# Altium PCB PCB1.PcbDoc (part 1 of 2)
Units mm, origin at the board's own origin, x right, y up, seen from the top; angles counter-clockwise.
Board outline 138.94 x 170 mm, 2 copper layers (Top Layer, Bottom Layer); 258 components, 165 nets, 778 pads, 42 vias.
Unrouted connection lines stored in the file: 312.
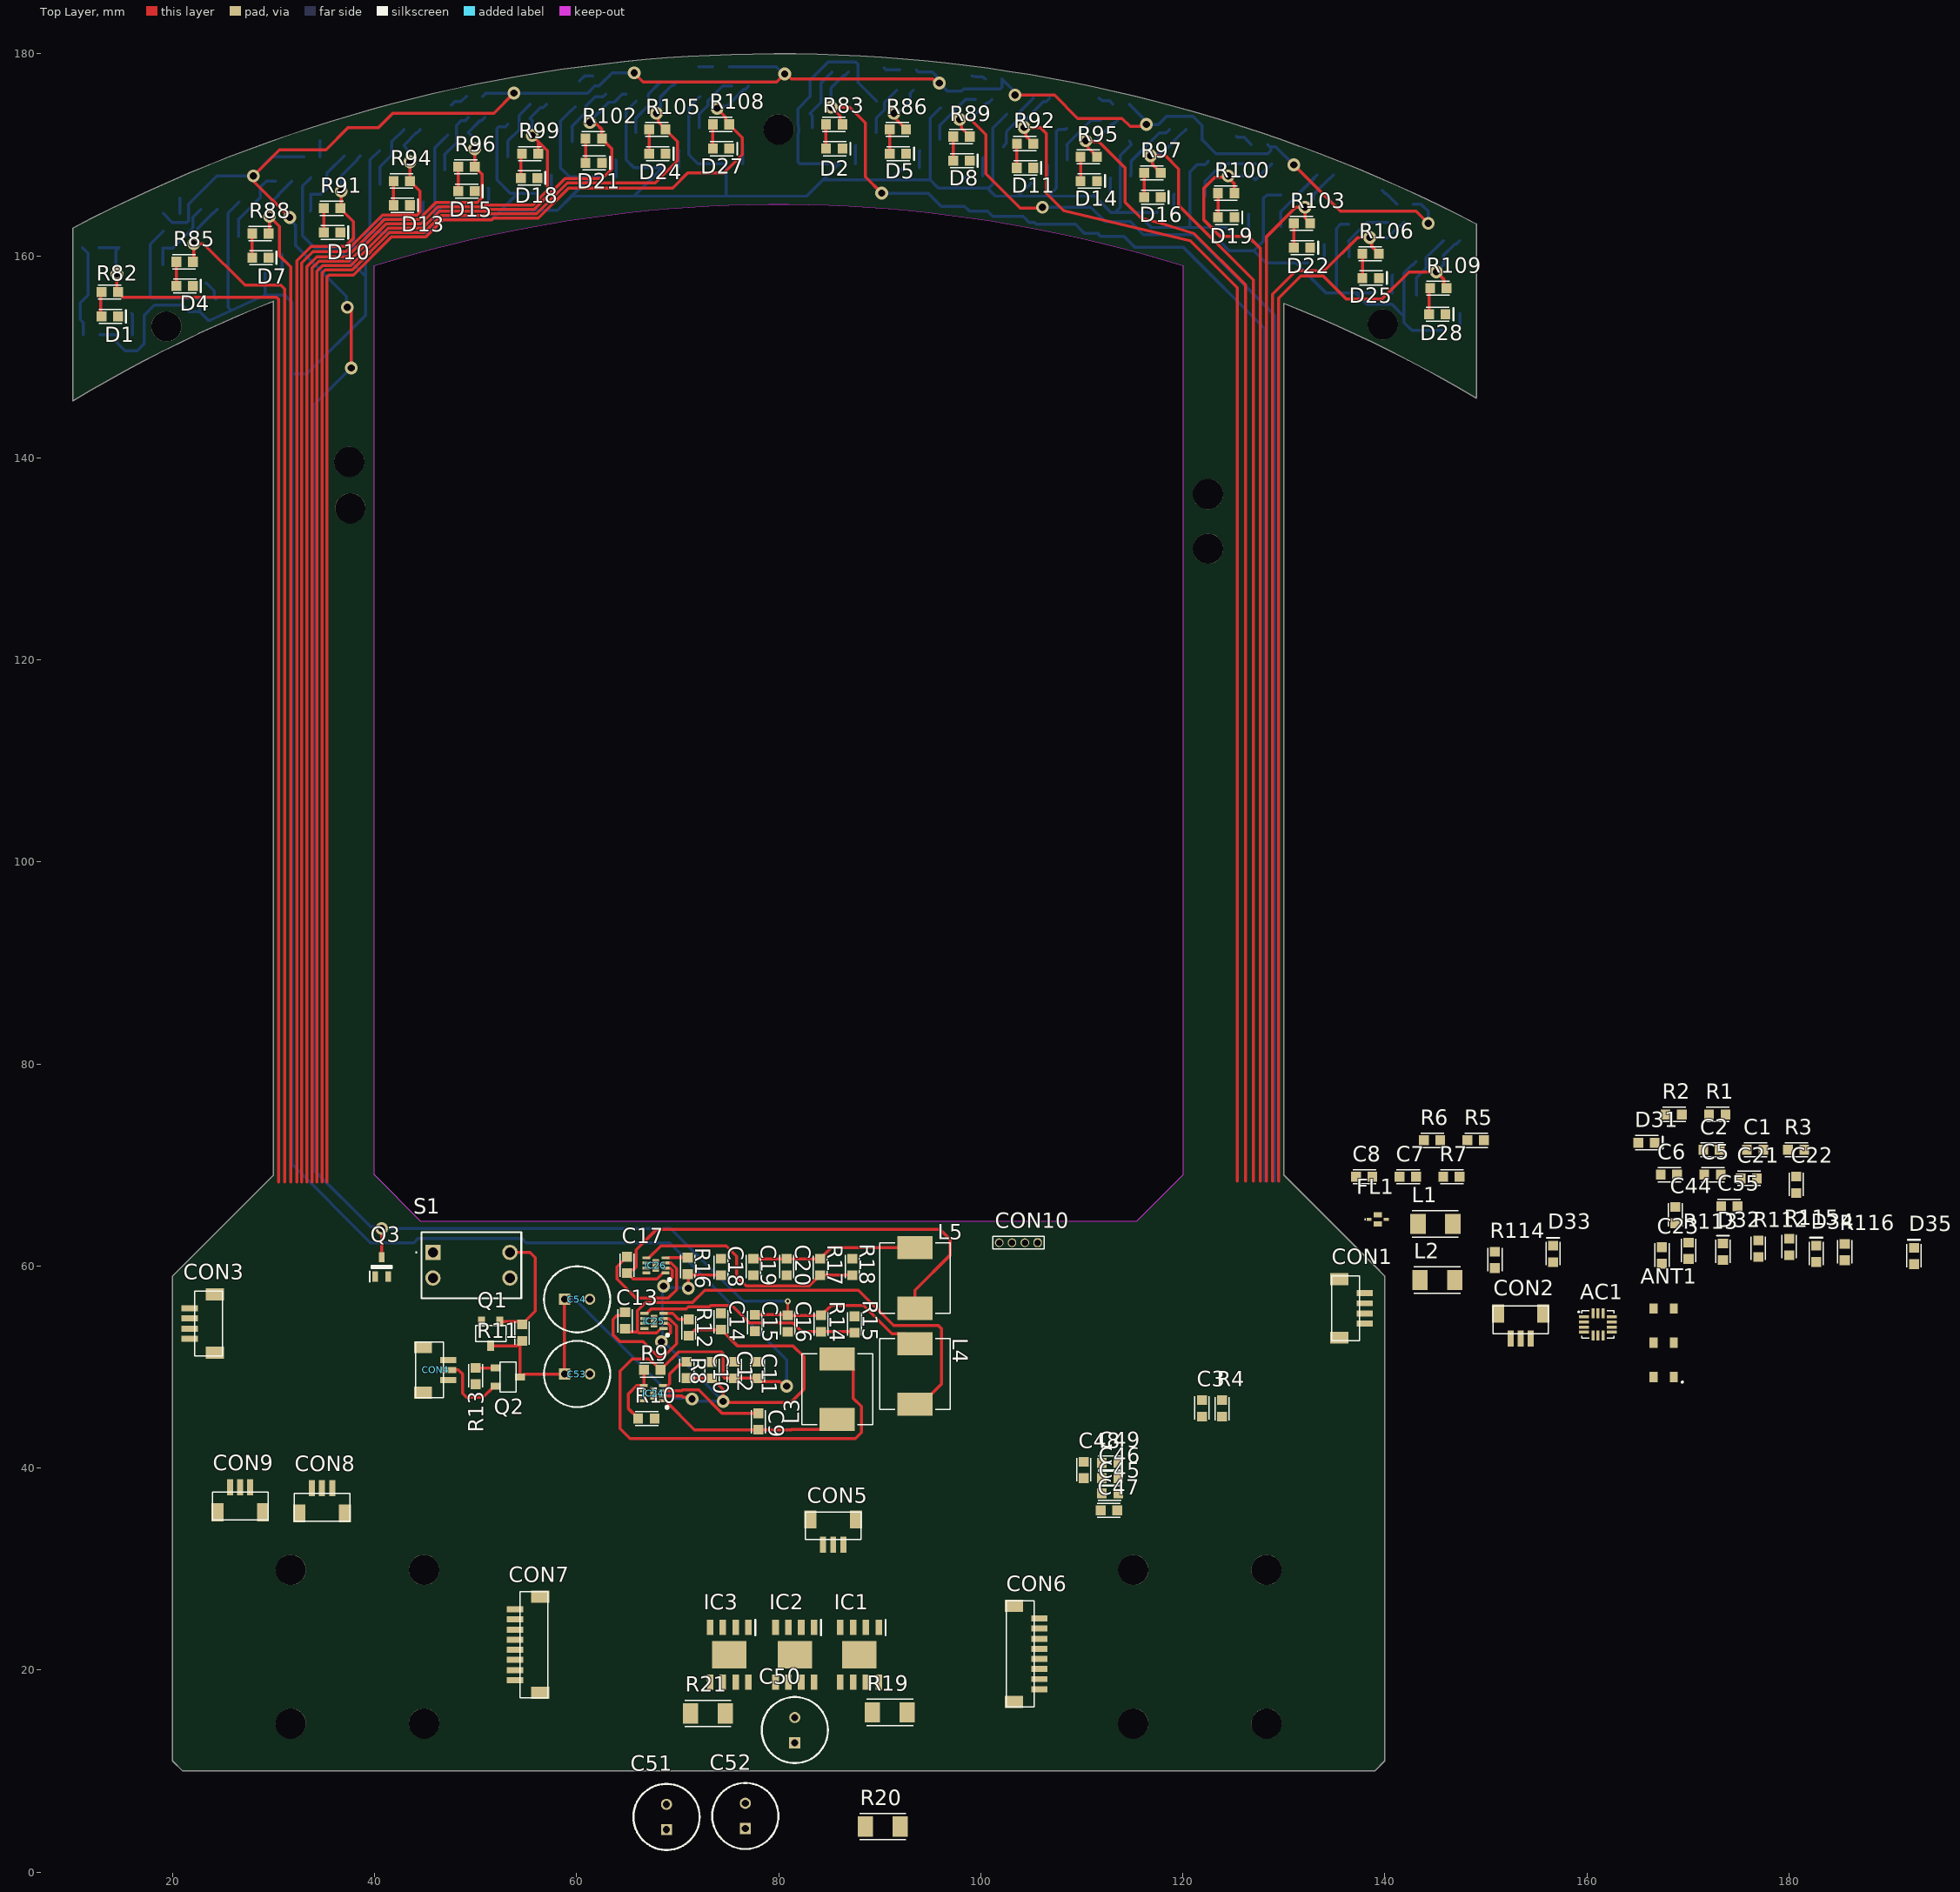
[diagram p0: Top Layer view]
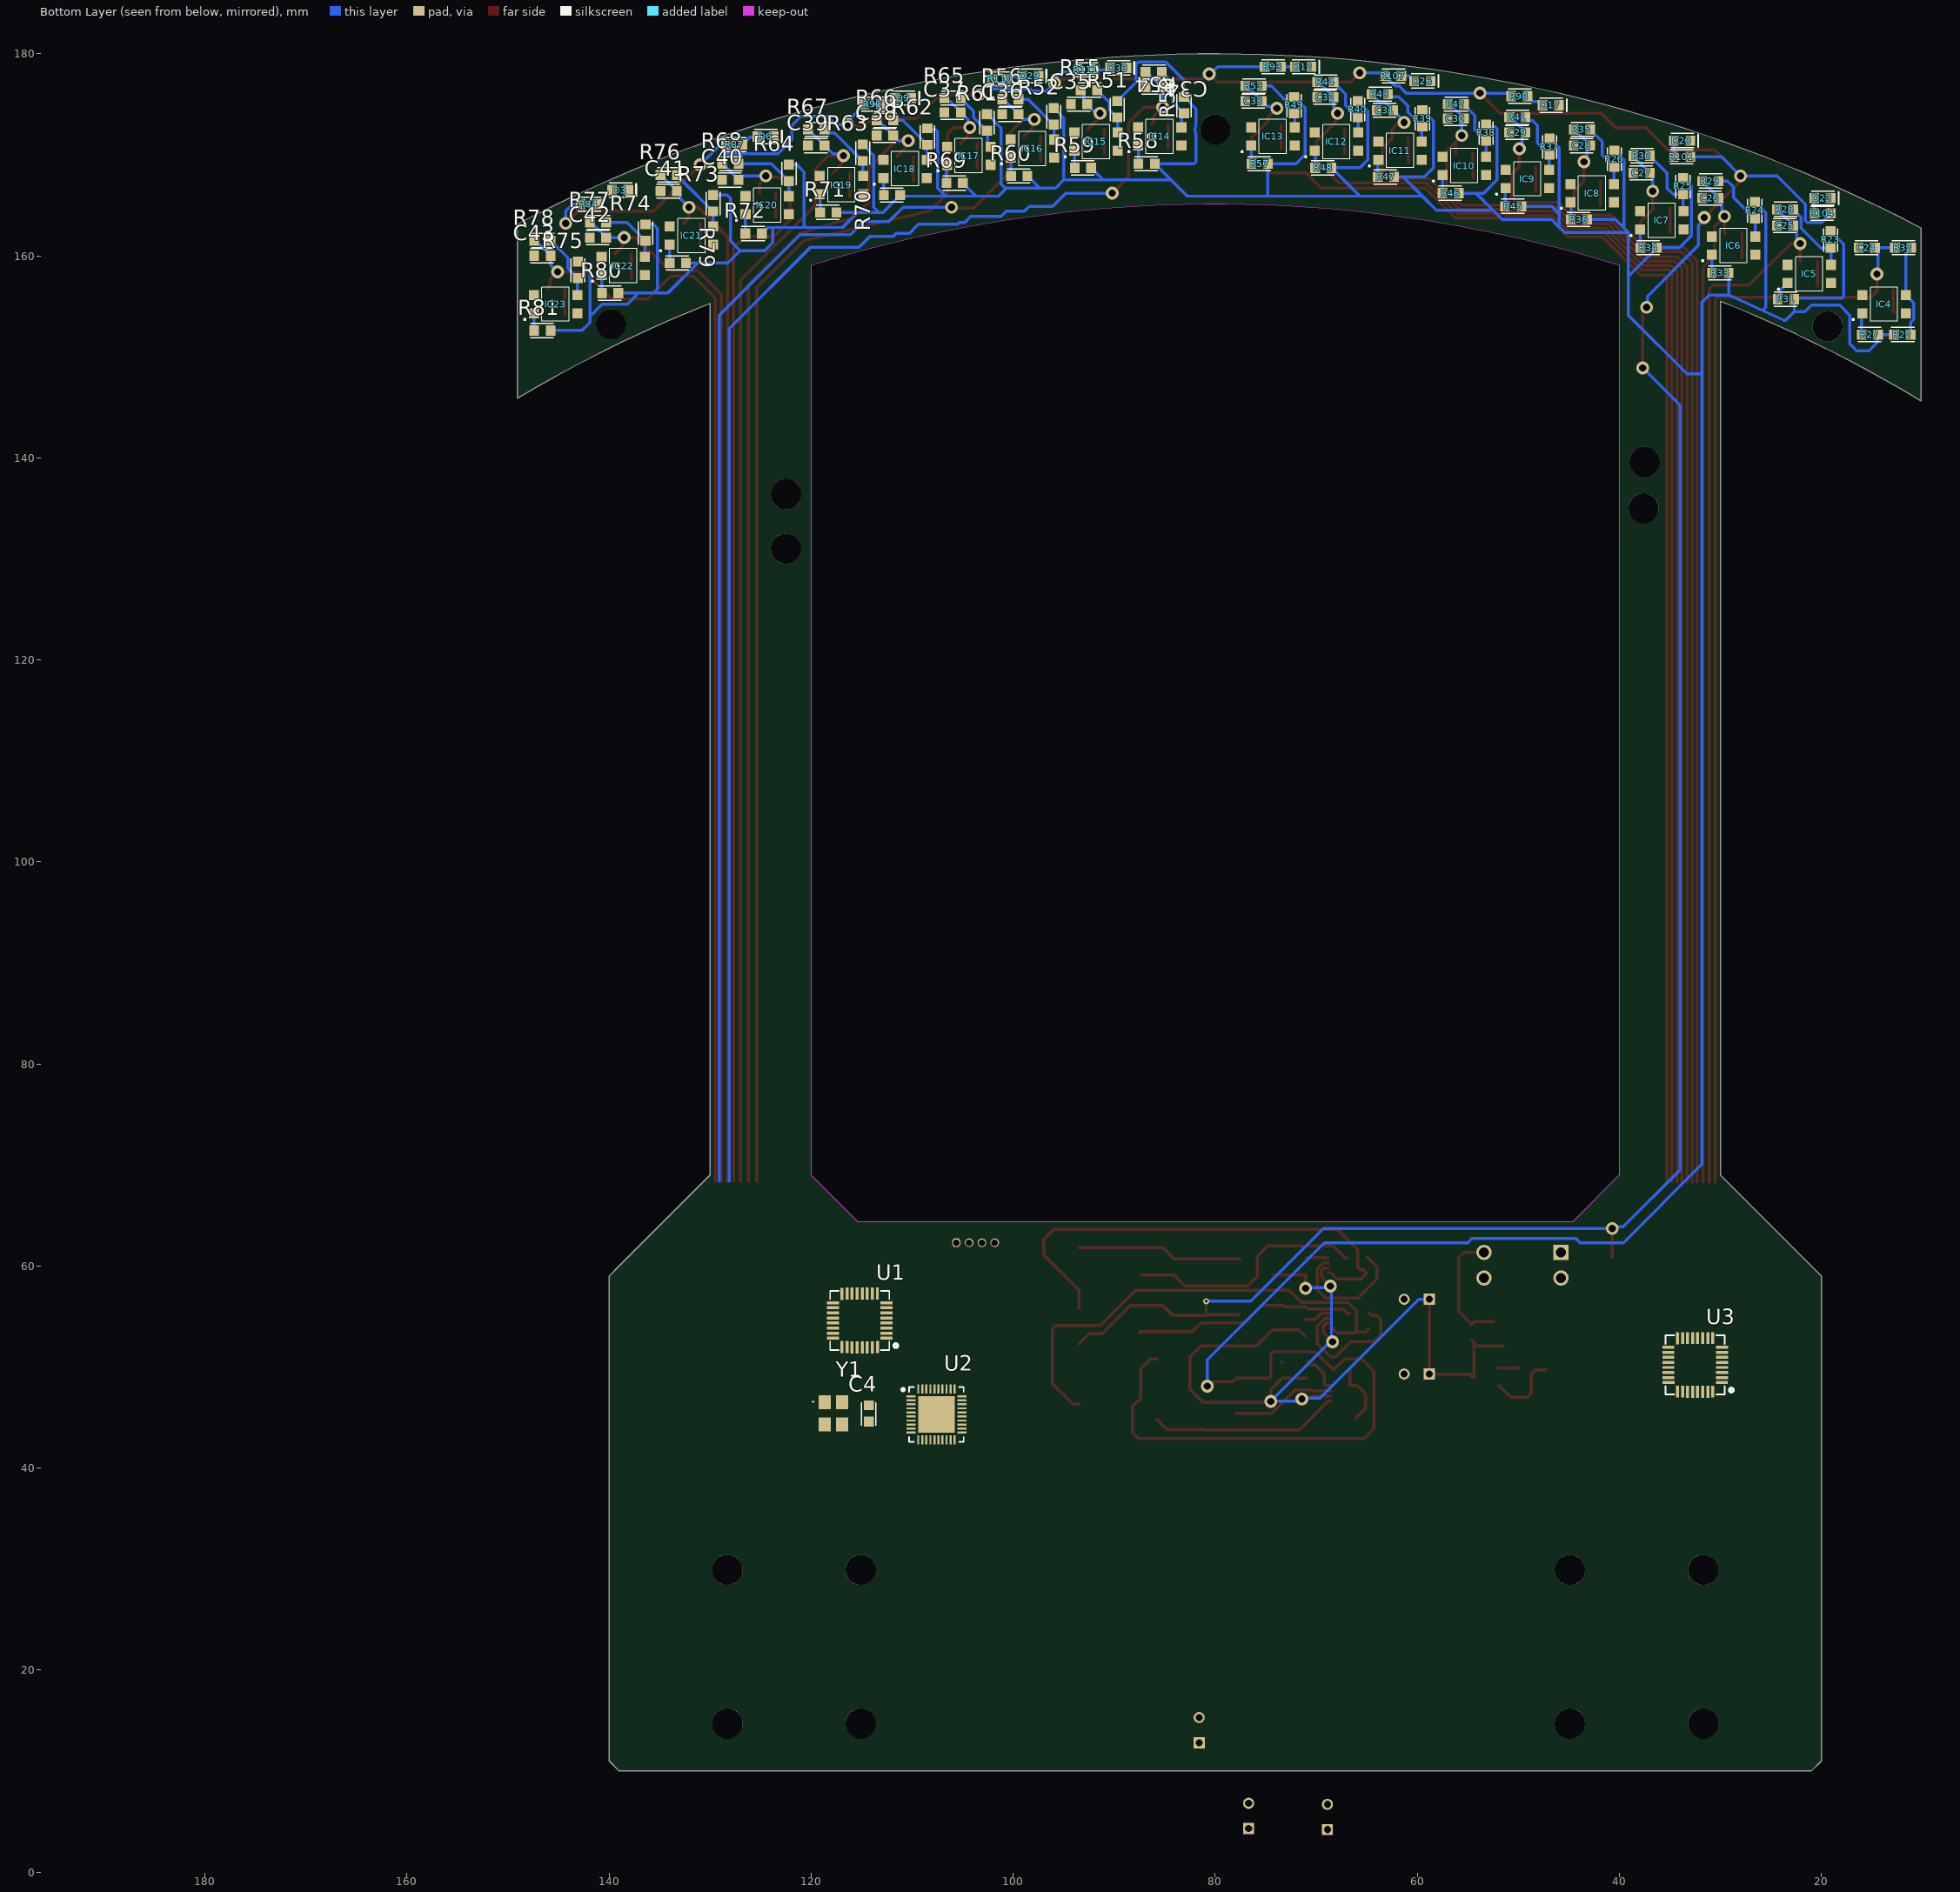
[diagram p1: Bottom Layer view, seen from below]

## Layer stack, top to bottom
Top Solder: solder mask 0.0102, Solder Resist, Dk 3.5
Top Layer: signal copper 0.0356
Dielectric 1: dielectric 0.32, FR-4, Dk 4.8
Bottom Layer: signal copper 0.0356
Bottom Solder: solder mask 0.0102, Solder Resist, Dk 3.5

## Board outline
20,11 21,10 139,10 140,11 140,59 139,60 130,69 130,155.301 cw(c80,30) 149.05,145.899 149.077,145.945 149.077,163.148 ccw(c80,30) 10.138,162.738 10.138,145.665 10.151,145.643 cw(c80,30) 29.998,155.506 29.998,69.002 30,69 21,60 20,59
cut-out: 44.6,64.4 40,69 39.99,69.01 39.99,159.032 cw(c80,30) 120.01,159.032 120.01,69 120,69 115.4,64.4

## Design rules (kind name [scope] priority, off if disabled: settings)
Clearance [All] p1: gap=0.254 ignorepadtopadclearanceinfootprint=TRUE except(0.127: Arc-Arc Arc-Track Arc-SMDPad Arc-Via Arc-Text Track-Track Track-SMDPad Track-Via Track-Text SMDPad-SMDPad SMDPad-Via SMDPad-Text THPad-Via THPad-Text Via-Via Via-Text Fill-Text Poly-Text Region-Text Text-Text Text-Hole; 0.2: Arc-THPad Track-THPad SMDPad-THPad; 0.33: Arc-Hole Track-Hole SMDPad-Hole THPad-Hole Via-Hole Fill-Hole Poly-Hole Region-Hole; 0.5: THPad-THPad)
HoleSize [All] p1: absolutevalues=TRUE maxlimit=2.54 minlimit=0.02 maxpercent=80.000 minpercent=20.000
HoleToHoleClearance [All] p1: gap=0.127 allowstackedmicrovias=TRUE
PlaneClearance [All] p1: clearance=0.3
PlaneConnect PlaneConnect_1 [(HasFootprint('R 2512'))] p1: planeconnectstyle=Relief reliefexpansion=0.508 reliefentries=4 reliefconductorwidth=0.254 reliefairgap=0.254
PlaneConnect [All] p2: planeconnectstyle=Relief reliefexpansion=0.508 reliefentries=4 reliefconductorwidth=0.254 reliefairgap=0.254
PolygonConnect "Polygon Power Connection" [(HasFootprint('DFN 5x6')) OR (HasFootprint('R 2512')) OR IsVia OR HasFootprint('SMD PAD')] p1: connectstyle=Direct reliefconductorwidth=0.254 reliefentries=4 polygonreliefangle="90 Angle" airgapwidth=0.254 // Conection to high power components
PolygonConnect [All] p2: connectstyle=Relief reliefconductorwidth=0.254 reliefentries=4 polygonreliefangle="90 Angle" airgapwidth=0.254
RoutingVias [All] p1: holewidth=0.3 width=0.5 viastyle="Through Hole" minholewidth=0.2 minwidth=0.3 maxholewidth=1 maxwidth=1.27
SilkToSilkClearance [All] p1: silktosilkclearance=0.127
SolderMaskExpansion [All] p1: expansion=0.102 istentingtop=TRUE
Width [All] p1: maxlimit=0.508 minlimit=0.127 preferedwidth=0.3
25 further rules are at their usual default settings.

## Classes and differential pairs
component class zasilanie: 150uF *1 *2 *3 C9 C10 C11 C12 C13 C14 C15 C16 C17 C18 C19 C20 C53 C54 CON4 IC24 IC25 IC26 L3 L4 L5 Q1 Q2 R8 R9 R10 R11 R12 R13 R14 R15 R16 R17 R18 S1
component class STM-LF: AC1 C5 C6 C7 C8 CON2 CON3 D31 D32 D33 R5 R6 R7 R112 R113 R114 U3
component class STM+WirelessModule: ANT1 C1 C2 C3 C4 C44 C45 C46 C47 C48 C49 C55 CON1 CON10 D34 D35 FL1 L1 L2 R1 R2 R3 R4 R115 R116 U1 U2 Y1
component class silniki: 0,1µF * C21 C22 C23 C50 C51 C52 CON5 CON6 CON7 CON8 CON9 IC1 IC2 IC3 R19 R20 R21
component class Ledy: D1 D2 D3 D4 D5 D6 D7 D8 D9 D10 D11 D12 D13 D14 D15 D16 D17 D18 D19 D20 D21 D22 D23 D24 D25 D26 D27 D28 D29 D30 Q3 R82 R83 R84 R85 R86 R87 R88 R89 R90 R91 R92 R93 R94 R95 R96 R97 R98 R99 R100 R101 R102 R103 R104 R105 R106 R107 R108 R109 R110 R111
component class KTIR-FRONT: C24 C25 C26 C27 C28 C29 C30 C31 C32 C33 C34 C35 C36 C37 C38 C39 C40 C41 C42 C43 IC4 IC5 IC6 IC7 IC8 IC9 IC10 IC11 IC12 IC13 IC14 IC15 IC16 IC17 IC18 IC19 IC20 IC21 IC22 IC23 R22 R23 R24 R25 R26 R27 R28 R29 R30 R31 R32 R33 R34 R35 R36 R37 R38 R39 R40 R41 R42 R43 R44 R45 R46 R47 R48 R49 R50 R51 R52 R53 R54 R55 R56 R57 R58 R59 R60 R61 R62 R63 R64 R65 R66 R67 R68 R69 R70 R71 R72 R73 R74 R75 R76 R77 R78 R79 R80 R81

## Components (designator, comment, footprint, x,y, rotation, side; value= is the part's Value field where it differs from the comment)
AC1 "LSM6DSOXTR" LGA-14_1 161.1,54.2 r0 top
ANT1 "M830520" M830520 167.6,52.4 r90 top
C1 "10uF" "C 0603" 176.657,71.501 r0 top
C2 "100nF" "C 0603" 172.339,71.501 r0 top
C3 "6.8pF" "C 0603" 121.9,45.9 r90 top
C4 "6.8pF" "C 0603" 114.3,45.4 r270 bottom
C5 "100nF" "C 0603" 172.433,69.031 r0 top
C6 "100nF" "C 0603" 168.115,69.031 r0 top
C7 "10uF" "C 0603" 142.276,68.831 r0 top
C8 "100nF" "C 0603" 137.958,68.831 r0 top
C9 "100nF" "C 0603" 78,44.6 r270 top
C10 "10uF" "C 0603" 73.4,49.674 r270 top
C11 "22uF" "C 0603" 77.9,49.687 r270 top
C12 "22uF" "C 0603" 75.6,49.687 r270 top
C13 "100nF" "C 0603" 64.8,54.6 r270 top
C14 "10uF" "C 0603" 74.3,54.5 r270 top
C15 "22uF" "C 0603" 77.637,54.352 r90 top
C16 "22uF" "C 0603" 80.9,54.3 r90 top
C17 "100nF" "C 0603" 65,60.1 r270 top
C18 "10uF" "C 0603" 74.3,59.9 r270 top
C19 "22uF" "C 0603" 77.5,59.9 r90 top
C20 "22uF" "C 0603" 80.8,59.9 r90 top
C21 "47µF" "C 0603" 176.023,68.671 r0 top
C22 "47µF" "C 0603" 180.722,68.036 r90 top
C23 "47µF" "C 0603" 167.434,61.036 r90 top
C24 "22nF" "C 0603" 15.513,160.8 r0 bottom
C25 "22nF" "C 0603" 23.6,163 r0 bottom
C26 "22nF" "C 0603" 31,165.7 r0 bottom
C27 "22nF" "C 0603" 37.8,168.2 r0 bottom
C28 "22nF" "C 0603" 43.7,170.9 r0 bottom
C29 "22nF" "C 0603" 50.1,172.2 r0 bottom
C30 "22nF" "C 0603" 56.2,173.6 r0 bottom
C31 "22nF" "C 0603" 63.2,174.4 r0 bottom
C32 "22nF" "C 0603" 69.1,175.7 r0 bottom
C33 "22nF" "C 0603" 76.2,175.3 r0 bottom
C34 "22nF" "C 0603" 86.1,176.7 r0 bottom
C35 "22nF" "C 0603" 93.487,175 r0 bottom
C36 "22nF" "C 0603" 100.287,174 r0 bottom
C37 "22nF" "C 0603" 106,174.2 r0 bottom
C38 "22nF" "C 0603" 112.7,171.9 r0 bottom
C39 "22nF" "C 0603" 119.5,170.9 r0 bottom
C40 "22nF" "C 0603" 128,167.5 r0 bottom
C41 "22nF" "C 0603" 134.1,166.4 r0 bottom
C42 "22nF" "C 0603" 141.1,161.8 r0 bottom
C43 "22nF" "C 0603" 146.6,160 r0 bottom
C44 "1uF" "C 0603" 168.757,65.037 r90 top
C45 "0.1uF" "C 0603" 112.8,37.5 r180 top
C46 "0.1uF" "C 0603" 112.8,39 r180 top
C47 "0.1uF" "C 0603" 112.7,35.8 r180 top
C48 "0.1uF" "C 0603" 110.2,39.8 r90 top
C49 "0.1uF" "C 0603" 112.8,40.5 r180 top
C50 "0.1uF" CAPPRD250W50D655H1250 81.6,12.8 r90 top
C51 "0.1uF" CAPPRD250W50D655H1250 68.9,4.202 r90 top
C52 "0.1uF" CAPPRD250W50D655H1250 76.7,4.302 r90 top
C53 "150uF" CAPPRD250W50D655H1250 58.8,49.3 r0 top
C54 "150uF" CAPPRD250W50D655H1250 58.8,56.7 r0 top
C55 "10pF" "C 0603" 174.1,65.9 r180 top
CON1 "4 PIN" BM04B-SRSS-TB 136.5,55.8 r90 top
CON2 "3 Pin" BM03B-SRSS-TB 153.45,54.3 r0 top
CON3 "4 PIN" BM04B-SRSS-TB 23.2,54.3 r270 top
CON4 "3 Pin" BM03B-SRSS-TB 45.8,49.7 r90 top
CON5 "3 Pin" BM03B-SRSS-TB 85.4,33.9 r0 top
CON6 "JST" BM08B-SRSS-TB 104.3,21.6 r90 top
CON7 "JST" BM08B-SRSS-TB 55.4,22.5 r270 top
CON8 "3 Pin" BM03B-SRSS-TB 34.8,36.5 r180 top
CON9 "3 Pin" BM03B-SRSS-TB 26.7,36.6 r180 top
CON10 "CON?" "Goldpin 1.27mm 4PIN" 103.735,62.3 r180 top
D1 "LED WHITE" "LED 0603 White" 13.8,154 r0 top
D2 "LED WHITE" "LED 0603 White" 85.5,170.6 r0 top
D3 "LED WHITE" "LED 0603 White" 138.913,166.5 r180 bottom
D4 "LED WHITE" "LED 0603 White" 21.2,157 r0 top
D5 "LED WHITE" "LED 0603 White" 91.8,170.1 r0 top
D6 "LED WHITE" "LED 0603 White" 124.513,171.8 r180 bottom
D7 "LED WHITE" "LED 0603 White" 28.7,159.8 r0 top
D8 "LED WHITE" "LED 0603 White" 98.1,169.4 r0 top
D9 "LED WHITE" "LED 0603 White" 110.9,175.6 r180 bottom
D10 "LED WHITE" "LED 0603 White" 35.8,162.3 r0 top
D11 "LED WHITE" "LED 0603 White" 104.387,168.7 r0 top
D12 "LED WHITE" "LED 0603 White" 71.3,178.7 r180 bottom
D13 "LED WHITE" "LED 0603 White" 42.7,165 r0 top
D14 "LED WHITE" "LED 0603 White" 110.7,167.4 r0 top
D15 "LED WHITE" "LED 0603 White" 49.1,166.4 r0 top
D16 "LED WHITE" "LED 0603 White" 117,165.8 r0 top
D17 "LED WHITE" "LED 0603 White" 46.8,174.9 r180 bottom
D18 "LED WHITE" "LED 0603 White" 55.3,167.7 r0 top
D19 "LED WHITE" "LED 0603 White" 124.3,163.8 r0 top
D20 "LED WHITE" "LED 0603 White" 33.8,171.4 r180 bottom
D21 "LED WHITE" "LED 0603 White" 61.7,169.2 r0 top
D22 "LED WHITE" "LED 0603 White" 131.8,160.8 r0 top
D23 "LED WHITE" "LED 0603 White" 19.9,165.7 r180 bottom
D24 "LED WHITE" "LED 0603 White" 68,170.1 r0 top
D25 "LED WHITE" "LED 0603 White" 138.6,157.8 r0 top
D26 "LED WHITE" "LED 0603 White" 59.5,177.3 r180 bottom
D27 "LED WHITE" "LED 0603 White" 74.3,170.6 r0 top
D28 "LED WHITE" "LED 0603 White" 145.2,154.2 r0 top
D29 "LED WHITE" "LED 0603 White" 98.313,177.8 r180 bottom
D30 "LED WHITE" "LED 0603 White" 89.613,178.6 r180 bottom
D31 "LED WHITE" "LED 0603 White" 165.9,72.2 r0 top
D32 "LED WHITE" "LED 0603 White" 173.467,61.4 r90 top
D33 "LED WHITE" "LED 0603 White" 156.667,61.187 r90 top
D34 "LED WHITE" "LED 0603 White" 182.7,61.2 r90 top
D35 "LED WHITE" "LED 0603 White" 192.381,60.989 r90 top
FL1 "DEA162450BT-1295A1" DEA162450BT1295A1 139.3,64.6 r0 top
IC1 "DRV8251DDAR" SOIC127P600X170-9N 88,21.5 r270 top
IC2 "DRV8251DDAR" SOIC127P600X170-9N 81.6,21.5 r270 top
IC3 "DRV8251DDAR" SOIC127P600X170-9N 75.1,21.5 r270 top
IC4 "KTIR0711S" KTIR0711S 13.8,155.2 r180 bottom
IC5 "KTIR0711S" KTIR0711S 21.2,158.2 r180 bottom
IC6 "KTIR0711S" KTIR0711S 28.7,161 r180 bottom
IC7 "KTIR0711S" KTIR0711S 35.8,163.5 r180 bottom
IC8 "KTIR0711S" KTIR0711S 42.7,166.2 r180 bottom
IC9 "KTIR0711S" KTIR0711S 49.1,167.6 r180 bottom
IC10 "KTIR0711S" KTIR0711S 55.35,168.9 r180 bottom
IC11 "KTIR0711S" KTIR0711S 61.7,170.4 r180 bottom
IC12 "KTIR0711S" KTIR0711S 68,171.3 r180 bottom
IC13 "KTIR0711S" KTIR0711S 74.3,171.8 r180 bottom
IC14 "KTIR0711S" KTIR0711S 85.5,171.8 r180 bottom
IC15 "KTIR0711S" KTIR0711S 91.8,171.3 r180 bottom
IC16 "KTIR0711S" KTIR0711S 98.1,170.6 r180 bottom
IC17 "KTIR0711S" KTIR0711S 104.4,169.9 r180 bottom
IC18 "KTIR0711S" KTIR0711S 110.7,168.6 r180 bottom
IC19 "KTIR0711S" KTIR0711S 117,167 r180 bottom
IC20 "KTIR0711S" KTIR0711S 124.35,165 r180 bottom
IC21 "KTIR0711S" KTIR0711S 131.85,162 r180 bottom
IC22 "KTIR0711S" KTIR0711S 138.6,159 r180 bottom
IC23 "KTIR0711S" KTIR0711S 145.3,155.2 r180 bottom
IC24 "RT7251" SON50P200X200X80-9N-D 67.6,47.4 r180 top
IC25 "RT7251" SON50P200X200X80-9N-D 67.65,54.55 r180 top
IC26 "RT7251" SON50P200X200X80-9N-D 67.85,60.05 r180 top
L1 "22uH" "L 1206" 145.013,64.166 r0 top
L2 "22uH" "L 1206" 145.2,58.6 r0 top
L3 "15uH" HPI0630 85.8,47.8 r90 top
L4 "22uH" HPI0630 93.5,49.3 r90 top
L5 "4.7uH" HPI0630 93.5,58.8 r90 top
Q1 "Model" SOT23-3 51.5,53.3 r180 top
Q2 "Model" SOT23-3 53.2,49 r270 top
Q3 "Model" SOT323 40.7,59.9 r90 top
R1 "20k" "R 0603" 172.915,75.001 r0 top
R2 "5.6k" "R 0603" 168.597,75.001 r0 top
R3 "10k" "R 0603" 180.721,71.501 r0 top
R4 "150" "R 0603" 123.9,45.9 r270 top
R5 "1k" "R 0603" 148.996,72.431 r0 top
R6 "1k" "R 0603" 144.678,72.431 r0 top
R7 "10k" "R 0603" 146.594,68.831 r0 top
R8 "100k" "R 0603" 70.9,49.7 r270 top
R9 "110k" "R 0603" 67.487,49.7 r180 top
R10 "36k" "R 0603" 66.9,44.9 r0 top
R11 "10k" "R 0603" 54.6,53.4 r270 top
R12 "100k" "R 0603" 71.1,53.9 r270 top
R13 "100k" "R 0603" 50,49.1 r90 top
R14 "120k" "R 0603" 84.2,54.3 r270 top
R15 "22k" "R 0603" 87.5,54.2 r90 top
R16 "100k" "R 0603" 71,60 r270 top
R17 "110k" "R 0603" 84.1,59.9 r270 top
R18 "91K" "R 0603" 87.3,59.9 r90 top
R19 "0.2R" "R 1206" 91,15.8 r180 top
R20 "0.2R" "R 1206" 90.3,4.5 r180 top
R21 "0.2R" "R 1206" 73,15.7 r0 top
R22 "10k" "R 0603" 11.987,152.2 r180 bottom
R23 "10k" "R 0603" 19.1,161.613 r270 bottom
R24 "10k" "R 0603" 26.6,164.5 r270 bottom
R25 "10k" "R 0603" 33.7,166.9 r270 bottom
R26 "10k" "R 0603" 40.5,169.6 r270 bottom
R27 "120R" "R 0603" 15.213,152.2 r0 bottom
R28 "8k" "R 0603" 23.6,164.6 r180 bottom
R29 "8k" "R 0603" 31,167.4 r180 bottom
R30 "8k" "R 0603" 37.8,169.9 r180 bottom
R31 "120R" "R 0603" 23.5,155.7 r0 bottom
R32 "8k" "R 0603" 11.913,160.8 r180 bottom
R33 "120R" "R 0603" 30,158.3 r0 bottom
R34 "120R" "R 0603" 37.1,160.8 r0 bottom
R35 "8k" "R 0603" 43.7,172.5 r180 bottom
R36 "120R" "R 0603" 44,163.6 r0 bottom
R37 "10k" "R 0603" 46.9,170.8 r270 bottom
R38 "10k" "R 0603" 53.2,172.2 r270 bottom
R39 "10k" "R 0603" 59.5,173.6 r270 bottom
R40 "10k" "R 0603" 65.9,174.5 r270 bottom
R41 "8k" "R 0603" 50.1,173.7 r180 bottom
R42 "8k" "R 0603" 56.2,175 r180 bottom
R43 "8k" "R 0603" 63.713,176 r180 bottom
R44 "8k" "R 0603" 69.1,177.2 r180 bottom
R45 "120R" "R 0603" 50.5,164.9 r0 bottom
R46 "120R" "R 0603" 56.7,166.2 r0 bottom
R47 "120R" "R 0603" 63.1,167.8 r0 bottom
R48 "120R" "R 0603" 69.3,168.7 r0 bottom
R49 "10k" "R 0603" 72.2,174.913 r270 bottom
R50 "10k" "R 0603" 83.1,174.913 r270 bottom
R51 "10k" "R 0603" 89.7,174.5 r270 bottom
R52 "10k" "R 0603" 96,173.8 r270 bottom
R53 "8k" "R 0603" 76.2,176.8 r180 bottom
R54 "8k" "R 0603" 86.1,178.2 r180 bottom
R55 "8k" "R 0603" 92.5,176.4 r180 bottom
R56 "8k" "R 0603" 100.287,175.5 r180 bottom
R57 "120R" "R 0603" 75.6,169.1 r0 bottom
R58 "120R" "R 0603" 86.8,169.1 r0 bottom
R59 "120R" "R 0603" 93.1,168.7 r0 bottom
R60 "120R" "R 0603" 99.4,167.9 r0 bottom
R61 "10k" "R 0603" 102.6,173.2 r270 bottom
R62 "10k" "R 0603" 108.5,171.8 r270 bottom
R63 "10k" "R 0603" 114.9,170.2 r270 bottom
R64 "10k" "R 0603" 122.2,168.2 r270 bottom
R65 "8k" "R 0603" 106,175.6 r180 bottom
R66 "8k" "R 0603" 112.7,173.4 r180 bottom
R67 "8k" "R 0603" 119.5,172.5 r180 bottom
R68 "8k" "R 0603" 128,169.1 r180 bottom
R69 "120R" "R 0603" 105.8,167.2 r0 bottom
R70 "120R" "R 0603" 112,166 r0 bottom
R71 "120R" "R 0603" 118.3,164.3 r0 bottom
R72 "120R" "R 0603" 125.7,162.2 r0 bottom
R73 "10k" "R 0603" 129.7,165.2 r270 bottom
R74 "10k" "R 0603" 136.4,162.3 r270 bottom
R75 "10k" "R 0603" 143.1,158.6 r270 bottom
R76 "8k" "R 0603" 134.1,168 r180 bottom
R77 "8k" "R 0603" 141.1,163.3 r180 bottom
R78 "8k" "R 0603" 146.6,161.5 r180 bottom
R79 "120R" "R 0603" 133.2,159.3 r0 bottom
R80 "120R" "R 0603" 139.9,156.3 r0 bottom
R81 "120R" "R 0603" 146.6,152.6 r0 bottom
R82 "Value" "R 0603" 13.8,156.4 r180 top
R83 "Value" "R 0603" 85.5,173 r180 top
R84 "Value" "R 0603" 142,165.1 r180 bottom
R85 "Value" "R 0603" 21.2,159.4 r180 top
R86 "Value" "R 0603" 91.8,172.5 r180 top
R87 "Value" "R 0603" 127.6,171 r180 bottom
R88 "Value" "R 0603" 28.7,162.2 r180 top
R89 "Value" "R 0603" 98.1,171.8 r180 top
R90 "Value" "R 0603" 113.9,175 r180 bottom
R91 "Value" "R 0603" 35.8,164.7 r180 top
R92 "Value" "R 0603" 104.4,171.1 r180 top
R93 "Value" "R 0603" 74.3,178.7 r180 bottom
R94 "Value" "R 0603" 42.7,167.4 r180 top
R95 "Value" "R 0603" 110.7,169.8 r180 top
R96 "Value" "R 0603" 49.1,168.8 r180 top
R97 "Value" "R 0603" 117,168.2 r180 top
R98 "Value" "R 0603" 49.9,175.8 r180 bottom
R99 "Value" "R 0603" 55.4,170.1 r180 top
R100 "Value" "R 0603" 124.3,166.2 r180 top
R101 "Value" "R 0603" 33.8,169.8 r0 bottom
R102 "Value" "R 0603" 61.7,171.6 r180 top
R103 "Value" "R 0603" 131.8,163.2 r180 top
R104 "Value" "R 0603" 19.9,164.2 r0 bottom
R105 "Value" "R 0603" 68,172.5 r180 top
R106 "Value" "R 0603" 138.6,160.2 r180 top
R107 "Value" "R 0603" 62.4,177.8 r180 bottom
R108 "Value" "R 0603" 74.3,173 r180 top
R109 "Value" "R 0603" 145.3,156.8 r180 top
R110 "Value" "R 0603" 101.3,177.5 r180 bottom
R111 "Value" "R 0603" 92.8,178.4 r180 bottom
R112 "Value" "R 0603" 176.967,61.7 r90 top
R113 "Value" "R 0603" 170.067,61.5 r90 top
R114 "Value" "R 0603" 150.9,60.6 r90 top
R115 "Value" "R 0603" 180.023,61.87 r90 top
R116 "Value" "R 0603" 185.523,61.37 r90 top
S1 "DS1040-02RN" DS104002RN 45.78,61.34 r270 top
U1 "STM32G071K8U6" UFQFPN-32 115.2,54.6 r0 bottom
U2 "CC3301ENJARSBR" WQFN_JARSBR_TEX-M 107.6,45.3 r180 bottom
U3 "STM32G071K8U6" UFQFPN-32 32.5,50.2 r0 bottom
Y1 "40MHz" MCSJK7U1600123080B30 117.8,45.4 r270 bottom

## Footprints (in the part's own frame and the unit in brackets; to place one, negate y for a bottom-side part, rotate by r counter-clockwise, add the part's x,y. Pads: shape width x height; smd on the part's side, far side on the other; paste and mask are expansions set on the pad)
BM03B-SRSS-TB [mm]
  rect 0.6x1.6 smd: 1(-1,-1.5) 2(0,-1.5) 3(1,-1.5)
  rect 1.2x1.8 smd: A(-2.25,1) B(2.25,1)
  silkscreen extent -2.75,-1 2.75,1.75, body extent -2.5,-1.9 2.5,1.7, height 4.25
BM04B-SRSS-TB [mm]
  rect 0.6x1.6 smd: 1(-1.5,-1.5) 2(-0.5,-1.5) 3(0.5,-1.5) 4(1.5,-1.5)
  rect 1.2x1.8 smd: A(-2.9,1) B(2.9,1)
  silkscreen extent -3.2,-1 3.2,1.75, body extent -3,-1.7 3,1.9, height 4.25
BM08B-SRSS-TB [mm]
  rect 0.6x1.6 smd: 1(-3.5,-1.5) 2(-2.5,-1.5) 3(-1.5,-1.5) 4(-0.5,-1.5) 5(0.5,-1.5) 6(1.5,-1.5) 7(2.5,-1.5) 8(3.5,-1.5)
  rect 1.2x1.8 smd: A(-4.75,1) B(4.75,1)
  silkscreen extent -5.25,-1 5.25,1.75, body extent -5,-1.9 5,1.7, height 4.25
"C 0603" [mil]
  rect 38x39.37 smd: 1(-32,0) 2(32,0)
  silkscreen extent -43,-28 47,28, body extent -31,-16 31,16, height 24
CAPPRD250W50D655H1250 [mm]
  rect 1.1x1.1 hole 0.7: 1(0,0)
  round 1.1 hole 0.7: 2(2.5,0)
  silkscreen extent -2.02,-3.27 4.52,3.27, body extent -2.15,-3.4 4.65,3.4, height 12.5
DEA162450BT1295A1 [mm]
  rect 0.5x0.3 smd: 1(-0.85,0) 3(0.85,0)
  rect 0.8x0.5 smd: 2(0,-0.45) 4(0,0.45)
  silkscreen extent -1.3,-0.05 -1.2,0.05, body extent -1.07,-0.65 1.07,0.65, height 0.8
DS104002RN [mm]
  rect 1.509x1.509 hole 0.97: A1(0,0)
  round 1.509 hole 0.97: A2(2.54,0) B1(0,7.62) B2(2.54,7.62)
  silkscreen extent -2,-1.7 4.54,8.76, body extent -2,-1.14 4.54,8.76, height 7.7
"Goldpin 1.27mm 4PIN" [mm]
  oct 0.85x0.85 hole 0.65: 1(-1.905,0)
  round 0.85 hole 0.65: 2(-0.635,0) 3(0.635,0) 4(1.905,0)
  silkscreen extent -2.54,-0.64 2.54,0.64
HPI0630 [mm] "Power Inductor"
  rect 2.3x3.5 smd: 1(-3,0) 2(3,0)
  silkscreen extent -3.5,-3.5 3.5,3.5, body extent -3.65,-3.35 3.65,3.35, height 2.81
KTIR0711S [mm]
  rect 1x1 smd: 1(-2.15,-0.9) 2(-2.15,0.9) 3(2.15,0.9) 4(2.15,-0.9)
  silkscreen extent -3.1,-1.7 1.35,1.7
"L 1206" [mil]
  rect 60x78.74 smd: 1(-68,0) 2(68,0)
  silkscreen extent -91,-51 89,51, body extent -63,-31 63,31, height 32
"LED 0603 White" [mil]
  rect 38x39.37 smd: 1(-32,0) 2(32,0)
  silkscreen extent -43,-28 63,28, body extent -31,-16 31,16, height 22
LGA-14_1 [mm]
  rect 1x0.3 smd: 1(-1.375,0.75) 2(-1.375,0.25) 3(-1.375,-0.25) 4(-1.375,-0.75) 8(1.375,-0.75) 9(1.375,-0.25) 10(1.375,0.25) 11(1.375,0.75)
  rect 0.3x1 smd: 5(-0.5,-1.1) 6(0,-1.1) 7(0.5,-1.1) 12(0.5,1.1) 13(0,1.1) 14(-0.5,1.1)
  silkscreen extent -1.91,-1.35 1.6,1.35, body extent -1.5,-1.25 1.5,1.25, height 0.86
M830520 [mm]
  rect 1x0.8 smd: 1(-3.4,-1) 2(-3.4,1) 3(0,1) 4(3.4,1) 5(3.4,-1) 6(0,-1)
  silkscreen extent -3.95,-1.9 -3.85,-1.8, body extent -4,-1.5 4,1.5, height 1.3
MCSJK7U1600123080B30 [mm]
  rect 1.4x1.2 smd: 1(-1.1,-0.85) 2(1.1,-0.85) 3(1.1,0.85) 4(-1.1,0.85)
  silkscreen extent -1.2,-2.05 -1.1,-1.95, body extent -1.68,-1.33 1.68,1.33, height 0.9
"R 0603" [mil]
  rect 38x39.37 smd: 1(-32,0) 2(32,0)
  silkscreen extent -43,-28 47,28, body extent -41,-16 41,15, height 20
"R 1206" [mil]
  rect 60x78.74 smd: 1(-68,0) 2(68,0)
  silkscreen extent -91,-51 89,51, body extent -75,-32 75,31, height 24
SOIC127P600X170-9N [mm]
  rect 1.525x0.65 smd: 1(-2.712,1.905) 2(-2.712,0.635) 3(-2.712,-0.635) 4(-2.712,-1.905) 5(2.712,-1.905) 6(2.712,-0.635) 7(2.712,0.635) 8(2.712,1.905)
  rect 2.71x3.4 smd: 9(0,0)
  silkscreen extent -3.47,2.58 -1.95,2.58, body extent -3,-2.45 3,2.45, height 1.7
SON50P200X200X80-9N-D [mm]
  rect 0.8x0.3 smd: 1(-0.95,0.75) 2(-0.95,0.25) 3(-0.95,-0.25) 4(-0.95,-0.75) 5(0.95,-0.75) 6(0.95,-0.25) 7(0.95,0.25) 8(0.95,0.75)
  rect 0.65x1.25 smd: 9(0,0)
  silkscreen extent -1.48,1.28 -1.23,1.52, body extent -1.05,-1 1.05,1, height 0.8
SOT23-3 [mm]
  rect 0.7x1 smd: 1(-0.9,-1.2) 2(0.9,-1.2) 3(0,1.2)
  silkscreen extent -1.5,-0.8 1.5,0.8, body extent -1.5,-1.25 1.5,1.25, height 1.1
SOT323 [mm]
  rect 1x0.55 smd: 1(-0.95,0.65) 2(-0.95,-0.65) 3(0.95,0)
  silkscreen extent -1.45,-1 0.1,1.17, body extent -1.05,-1 1.05,1, height 1.1
UFQFPN-32 [mm]
  rect 1.2x0.3 smd paste-0.15 mask+0: 1(-2.642,1.753) 2(-2.655,1.25) 3(-2.655,0.75) 4(-2.655,0.25) 5(-2.655,-0.25) 6(-2.655,-0.75) 7(-2.655,-1.25) 8(-2.655,-1.75) 17(2.655,-1.75) 18(2.655,-1.25) 19(2.655,-0.75) 20(2.655,-0.25) 21(2.655,0.25) 22(2.655,0.75) 23(2.655,1.25) 24(2.642,1.753)
  rect 0.3x1.2 smd paste-0.15 mask+0: 9(-1.75,-2.655) 10(-1.25,-2.655) 11(-0.75,-2.655) 12(-0.25,-2.655) 13(0.25,-2.655) 14(0.75,-2.655) 15(1.25,-2.655) 16(1.753,-2.642) 25(1.753,2.642) 26(1.245,2.642) 27(0.75,2.655) 28(0.25,2.655) 29(-0.25,2.655) 30(-0.75,2.655) 31(-1.25,2.655) 32(-1.753,2.642)
  silkscreen extent -3.76,-2.93 2.93,2.93, body extent -2.6,-2.6 2.6,2.6, height 1.4
WQFN_JARSBR_TEX-M [mil]
  rect 36x8 smd paste+0 mask+0: 1(-99.5,70.88) 2(-99.5,55.13) 3(-99.5,39.38) 4(-99.5,23.63) 5(-99.5,7.88) 6(-99.5,-7.87) 7(-99.5,-23.62) 8(-99.5,-39.37) 9(-99.5,-55.12) 10(-99.5,-70.87) 21(99.5,-70.88) 22(99.5,-55.13) 23(99.5,-39.38) 24(99.5,-23.63) 25(99.5,-7.88) 26(99.5,7.87) 27(99.5,23.62) 28(99.5,39.37) 29(99.5,55.12) 30(99.5,70.87)
  rect 8x36 smd paste+0 mask+0: 11(-70.88,-99.5) 12(-55.13,-99.5) 13(-39.38,-99.5) 14(-23.63,-99.5) 15(-7.88,-99.5) 16(7.87,-99.5) 17(23.62,-99.5) 18(39.37,-99.5) 19(55.12,-99.5) 20(70.87,-99.5) 31(70.88,99.5) 32(55.13,99.5) 33(39.38,99.5) 34(23.63,99.5) 35(7.88,99.5) 36(-7.87,99.5) 37(-23.62,99.5) 38(-39.37,99.5) 39(-55.12,99.5) 40(-70.87,99.5)
  rect 142x142 smd paste-71 mask+0: 41(0,0)
  silkscreen extent -135,-107 107,107, body extent -101,-101 101,101, height 65

## Part data
AC1: "Accelerometer", Manufacturer_Name=STMicroelectronics, Mouser Part Number=511-LSM6DSOXTR, Arrow Part Number=LSM6DSOXTR, Arrow Price/Stock=https://www.arrow.com/en/products/lsm6dsoxtr/stmicroelectronics, Datasheet Link=https://www.st.com/resource/en/datasheet/lsm6dsox.pdf, Manufacturer_Part_Number=LSM6DSOXTR, Mouser Price/Stock=https://www.mouser.co.uk/ProductDetail/STMicroelectronics/LSM6DSOXTR?qs=l7cgNqFNU1i9dcjzItLpVQ%3D%3D
ANT1: "Antenna", Manufacturer_Name=AVX, Mouser Part Number=581-M830520, Arrow Part Number=M830520, Arrow Price/Stock=https://www.arrow.com/en/products/m830520/avx?region=nac, Datasheet Link=http://datasheets.avx.com/ethertronics/AVX-E_M830520.pdf, Height=1.4mm, Manufacturer_Part_Number=M830520, Mouser Price/Stock=https://www.mouser.co.uk/ProductDetail/AVX/M830520?qs=MLItCLRbWsxUgo9WosSjUA%3D%3D
C1 C2 C5 C6 C7 C8 C9 C10 C11 C12 C13 C14 C15 C16 C17 C18 C19 C20 C21 C22 C23 C24 C25 C26 C27 C28 C29 C30 C31 C32 C33 C34 C35 C36 C37 C38 C39 C40 C41 C42 C43 C44 C45 C46 C47 C48 C49 C55: library part Capacitor, "MLCC Capacitor"
C3 C4: library part Capacitor, "50V 6.8pF"
C50 C51 C52 C53 C54: library part UVZ1H331MPD, "Capacitor Polarised", Manufacturer_Name=Nichicon, Mouser Part Number=647-UVZ1H331MPD, Datasheet Link=https://www.nichicon.co.jp/english/products/pdfs/e-uvz.pdf, Height=17.5mm, Manufacturer_Part_Number=UVZ1H331MPD, Mouser Price/Stock=https://www.mouser.co.uk/ProductDetail/Nichicon/UVZ1H331MPD?qs=c%252BikF0N8D5kXe1Z5OktPOg%3D%3D
CON6 CON7: library part "8 Pin"
FL1: "Filter", Manufacturer_Name=TDK, Mouser Part Number=810-DEA162450BT1295A, Arrow Part Number=DEA162450BT-1295A1, Arrow Price/Stock=https://www.arrow.com/en/products/dea162450bt-1295a1/tdk?region=nac, Datasheet Link=https://product.tdk.com/system/files/dam/doc/product/rf/rf/filter/catalog/rf_bpf_dea162450bt-1295a1_en.pdf, Height=0.7mm, Manufacturer_Part_Number=DEA162450BT-1295A1, Mouser Price/Stock=https://www.mouser.co.uk/ProductDetail/TDK/DEA162450BT-1295A1?qs=r5DSvlrkXmJWOg7G%2F4pSbg%3D%3D
IC1 IC2 IC3: "Integrated Circuit", Manufacturer_Name="Texas Instruments", Mouser Part Number=595-DRV8251DDAR, Arrow Part Number=DRV8251DDAR, Arrow Price/Stock=https://www.arrow.com/en/products/drv8251ddar/texas-instruments?region=nac, Datasheet Link=https://www.arrow.com/en/products/drv8251ddar/texas-instruments?region=nac, Height=1.7mm, Manufacturer_Part_Number=DRV8251DDAR, Mouser Price/Stock=https://www.mouser.co.uk/ProductDetail/Texas-Instruments/DRV8251DDAR?qs=doiCPypUmgHTzZyfapGahQ%3D%3D
IC4 IC5 IC6 IC7 IC8 IC9 IC10 IC11 IC12 IC13 IC14 IC15 IC16 IC17 IC18 IC19 IC20 IC21 IC22 IC23: "Integrated Circuit", Manufacturer_Name=Kingbright, Mouser Part Number=N/A, Datasheet Link=https://componentsearchengine.com/Datasheets/2/KTIR0711S.pdf, Height=1.75mm, Manufacturer_Part_Number=KTIR0711S, Mouser Price/Stock=https://www.mouser.co.uk/ProductDetail/Kingbright/KTIR0711S?qs=2JU0tDl2GZ3YXiPz2j0FpQ%3D%3D
L1 L2 L3 L4 L5: library part Inductor, "General pourpouse inductor"
Q1 Q2: library part "P Mosfet", "General Pourpouse Mosfet"
Q3: library part "N Mosfet", "General Pourpouse Mosfet"
R1 R2 R3 R4 R5 R6 R7 R8 R9 R10 R11 R12 R13 R14 R15 R16 R17 R18 R19 R20 R21 R22 R23 R24 R25 R26 R27 R28 R29 R30 R31 R32 R33 R34 R35 R36 R37 R38 R39 R40 R41 R42 R43 R44 R45 R46 R47 R48 R49 R50 R51 R52 R53 R54 R55 R56 R57 R58 R59 R60 R61 R62 R63 R64 R65 R66 R67 R68 R69 R70 R71 R72 R73 R74 R75 R76 R77 R78 R79 R80 R81 R82 R83 R84 R85 R86 R87 R88 R89 R90 R91 R92 R93 R94 R95 R96 R97 R98 R99 R100 R101 R102 R103 R104 R105 R106 R107 R108 R109 R110 R111 R112 R113 R114 R115 R116: library part Resistor, "General pourpouse resistor"
S1: "Switch", Manufacturer_Name=Connfly, Datasheet Link=https://static.chipdip.ru/lib/974/DOC000974669.pdf, Height=7.6mm, Manufacturer_Part_Number=DS1040-02RN
U1 U3: "No Description Available", Mfr_Name=STMicroelectronics, Copyright="Copyright (C) 2024 Ultra Librarian. All rights reserved.", Manufacturer_Part_Number=STM32G071K8U6, RefDes=RefDes, Type=DEV
U2: "No Description Available", Mfr_Name="Texas Instruments", RefDes=RefDes, Type="RF Transceiver ICs"
Y1: library part MCSJK-7U-16.00-12-30-80-B-30, "Crystal or Oscillator", Manufacturer_Name=MULTICOMP, Datasheet Link=https://www.farnell.com/datasheets/2864166.pdf, Height=0.8mm, Manufacturer_Part_Number=MCSJK-7U-16.00-12-30-80-B-30

## Free pads (board coordinates)
  round 3 hole 3 mask-3: MOUNT(19.4,153) MOUNT(31.7,14.7) MOUNT(31.7,29.9) MOUNT(37.5,139.6) MOUNT(37.6,135) MOUNT(44.9,14.7) MOUNT(44.9,29.9) MOUNT(80,172.5) MOUNT(115.1,14.7) MOUNT(115.1,29.9) MOUNT(122.5,131) MOUNT(122.5,136.4) MOUNT(128.3,14.7) MOUNT(128.3,29.9) MOUNT(139.8,153.2)

## Via types
v1: diameter 1.27, hole 0.711, Top Layer to Bottom Layer, tented both sides, 41 vias
v2: diameter 0.6, hole 0.3, Top Layer to Bottom Layer, tented both sides, 1 vias

## Nets (pads, with @x,y where several pads share a name; then routed paths per layer and width w, separated by ;. In a path a pad name is that pad's centre, name@x,y a point inside that pad or via, vN(x,y) a via of type N, cw(c..) or ccw(c..) an arc to the next point about the centre after c; other vN are vias at no path point)
1.8V: C19.2 C20.2 C45.2 C46.2 C47.2 C48.2 C49.2 L5.2 R17.1 U2.4 U2.5 U2.17 U2.32 U2.35 | length 16.5
  Top Layer w0.3: C19.2@77.5,60.713 C20.2@80.8,60.713 R17.1@84.1,60.713 84.117,60.713 85.205,61.8 L5.2@93.5,61.8
3.3V: AC1.5 AC1.8 C2.2 C5.2 C6.2 C8.2 C11.2 C12.2 C44.2 CON6.3 CON7.3 CON8.2 CON10.4 IC1.4 IC2.4 IC3.4 L3.2 R3.1 R5.1 R6.1 R7.1 R9.1 R22.1 R23.1 R24.1 R25.1 R26.1 R27.1 R31.1 R33.1 R34.1 R36.1 R37.1 R38.1 R39.1 R40.1 R45.1 R46.1 R47.1 R48.1 R49.1 R50.1 R51.1 R52.1 R57.1 R58.1 R59.1 R60.1 R61.1 R62.1 R63.1 R64.1 R69.1 R70.1 R71.1 R72.1 R73.1 R74.1 R75.1 R79.1 R80.1 R81.1 U1.4 U2.39 U2.40 U3.4 | length 583.2
  Top Layer w0.3: R9.1@68.3,49.7 R9.1@68.3,49.717 ; v1(80.8,48.1) 80.538,48.1 80.096,48.542 78.233,48.542 C11.2@77.9,48.874 C12.2@75.6,48.874 74.676,48.874 74.5,49.05 74.5,51.324 74.324,51.5 70.1,51.5 68.65,50.05 68.633,50.05 R9.1@68.3,49.717 ; L3.2@85.8,50.8 86.4,50.8 87.4,49.8 87.4,46.881 88.2,46.081 88.2,43.5 87.6,42.9 65.3,42.9 64.3,43.9 64.3,49.6 65.5,50.8 67.2,50.8 67.95,50.05 67.967,50.05 R9.1@68.3,49.717
  Bottom Layer w0.3: R22.1@12.8,152.2 R27.1@14.4,152.2 14.474,152.126 14.474,151.426 15.3,150.6 16.5,150.6 17.2,151.3 17.2,154.1 18.2,155.1 21,155.1 21.617,154.483 22.687,154.483 ; R23.1@19.1,162.426 19.083,162.426 17.8,161.143 17.8,155.976 17.976,155.8 22.587,155.8 R31.1@22.687,155.7 22.687,154.483 ; R24.1@26.6,165.313 26.583,165.313 25.5,164.23 25.5,154.898 25.815,154.583 ; R33.1@29.187,158.3 29.187,156.129 ; R25.1@33.7,167.713 33.683,167.713 32.873,166.903 32.873,161.985 34.058,160.8 R34.1@36.287,160.8 36.287,160.783 38.97,158.1 39.1,158.1 ; R26.1@40.5,170.413 40.483,170.413 39.55,169.48 39.55,162.75 ; R36.1@43.187,163.6 40.4,163.6 39.55,162.75 ; R37.1@47.25,171.945 46.917,171.613 R37.1@46.9,171.613 46.883,171.613 45.98,170.71 45.98,164.18 ; R45.1@49.687,164.9 46.7,164.9 45.98,164.18 ; R38.1@53.2,173.013 52.963,172.776 52.276,172.776 52.1,172.6 52.1,167.5 53.4,166.2 54.2,166.2 ; R46.1@55.887,166.2 54.2,166.2 ; R39.1@59.85,174.745 59.517,174.413 R39.1@59.5,174.413 59.483,174.413 58.4,173.33 58.4,168.7 59.3,167.8 61.4,167.8 ; R47.1@62.287,167.8 61.4,167.8 ; R40.1@65.9,175.313 65.883,175.313 64.9,174.33 64.9,169.5 65.7,168.7 R48.1@68.487,168.7 68.487,168.683 68.155,168.35 68.137,168.35 65.687,165.9 ; R49.1@72.217,175.726 R49.1@72.2,175.726 72.183,175.726 71.1,174.643 71.1,170 72,169.1 R57.1@74.787,169.1 74.787,165.913 74.8,165.9 ; v1(80.8,48.1) 80.8,50.7 69.2,62.3 55,62.3 54.6,62.7 44.3,62.7 43.9,62.3 39.6,62.3 31.83,70.07 31.83,148.3 ; R51.1@89.7,175.313 87.85,177.163 87.85,178.95 87.6,179.2 84.913,179.2 83.1,177.387 R50.1@83.1,175.726 83.083,175.726 81.9,174.543 81.9,173.057 cw(c80,172.5) 81.9,171.943 81.9,169.276 82.076,169.1 R58.1@85.987,169.1 85.987,169.083 85.655,168.75 85.637,168.75 84.387,167.5 ; R59.1@92.287,168.7 92.287,168.683 91.955,168.35 91.937,168.35 91.087,167.5 ; R52.1@96.017,174.613 R52.1@96,174.613 95.983,174.613 95,173.63 95,167.5 ; 97.387,166.676 100.776,166.676 ; R60.1@98.587,167.9 98.587,167.883 98.255,167.55 98.237,167.55 97.387,166.7 95.8,166.7 95,167.5 ; R61.1@102.6,174.013 102.583,174.013 101.2,172.63 101.2,167.1 100.776,166.676 ; R69.1@104.987,167.2 104.987,167.183 103.705,165.9 ; R62.1@108.5,172.613 108.413,172.526 107.726,172.526 107.5,172.3 107.5,166.713 106.687,165.9 ; R63.1@114.729,171.345 R63.1@114.9,171.013 114.883,171.013 113.8,169.93 113.8,164.8 113.3,164.3 ; R71.1@117.487,164.3 115.394,164.3 ; R64.1@122.533,169.345 R64.1@122.2,169.013 121.413,169.013 120.7,168.3 120.7,163 120.5,162.8 ; R72.1@124.887,162.2 124.887,162.217 124.555,162.55 124.537,162.55 124.287,162.8 123.8,162.8 ; R73.1@129.7,166.013 128.313,166.013 128,165.7 128,161.476 127.024,160.5 ; R79.1@132.387,159.3 131.2,159.3 ; R74.1@136.417,163.113 R74.1@136.4,163.113 135.613,163.113 135.2,162.7 135.2,156.7 135.6,156.3 ; R80.1@139.087,156.3 137.1,156.3 ; R75.1@143.1,159.413 142.767,159.08 142.68,159.08 141.9,158.3 141.9,154 ; R81.1@145.787,152.6 142.7,152.6 141.9,153.4 141.9,154 ; 22.687,154.483 23.455,153.715 23.542,153.627 23.667,153.627 23.732,153.627 25.815,154.583 ; 25.815,154.583 29.187,156.129 ; 29.187,156.129 29.187,156.095 31.2,156.095 31.2,156.024 31.83,155.394 31.83,148.3 ; 31.83,148.3 33.3,148.3 39.1,154.1 39.1,158.1 ; 39.1,158.1 39.1,162.3 ; 39.1,162.3 45.4,162.3 45.98,162.88 ; 39.1,162.3 39.55,162.75 ; 45.98,162.88 46.7,163.6 51.6,163.6 52.5,164.5 ; 45.98,162.88 45.98,164.18 ; 52.5,164.5 54.2,166.2 ; 52.5,164.5 58.1,164.5 59.5,165.9 ; 59.5,165.9 61.4,167.8 ; 59.5,165.9 65.687,165.9 ; 65.687,165.9 74.8,165.9 ; 74.8,165.9 82.787,165.9 84.387,167.5 ; 84.387,167.5 91.087,167.5 ; 91.087,167.5 95,167.5 ; 100.776,166.676 100.776,166.59 101.465,165.9 103.705,165.9 ; 103.705,165.9 106.687,165.9 ; 106.687,165.9 111.087,165.9 R70.1@111.187,166 111.187,165.983 111.52,165.65 111.537,165.65 112.887,164.3 113.3,164.3 ; 113.3,164.3 115.394,164.3 ; 115.394,164.3 116.894,162.8 120.5,162.8 ; 120.5,162.8 123.8,162.8 ; 123.8,162.8 123.8,161.3 124.6,160.5 127.024,160.5 ; 127.024,160.5 128.224,159.3 131.2,159.3 ; 131.2,159.3 134.2,156.3 135.6,156.3 ; 135.6,156.3 137.1,156.3 ; 137.1,156.3 138.2,155.2 140.7,155.2 141.9,154